# Altium PCB Fly-Balance.PcbDoc
Units mil, origin at the board's own origin, x right, y up, seen from the top; angles counter-clockwise.
Board outline 1574.8 x 1574.8 mil, 2 copper layers (Top Layer, Bottom Layer); 112 components, 74 nets, 389 pads, 282 vias.
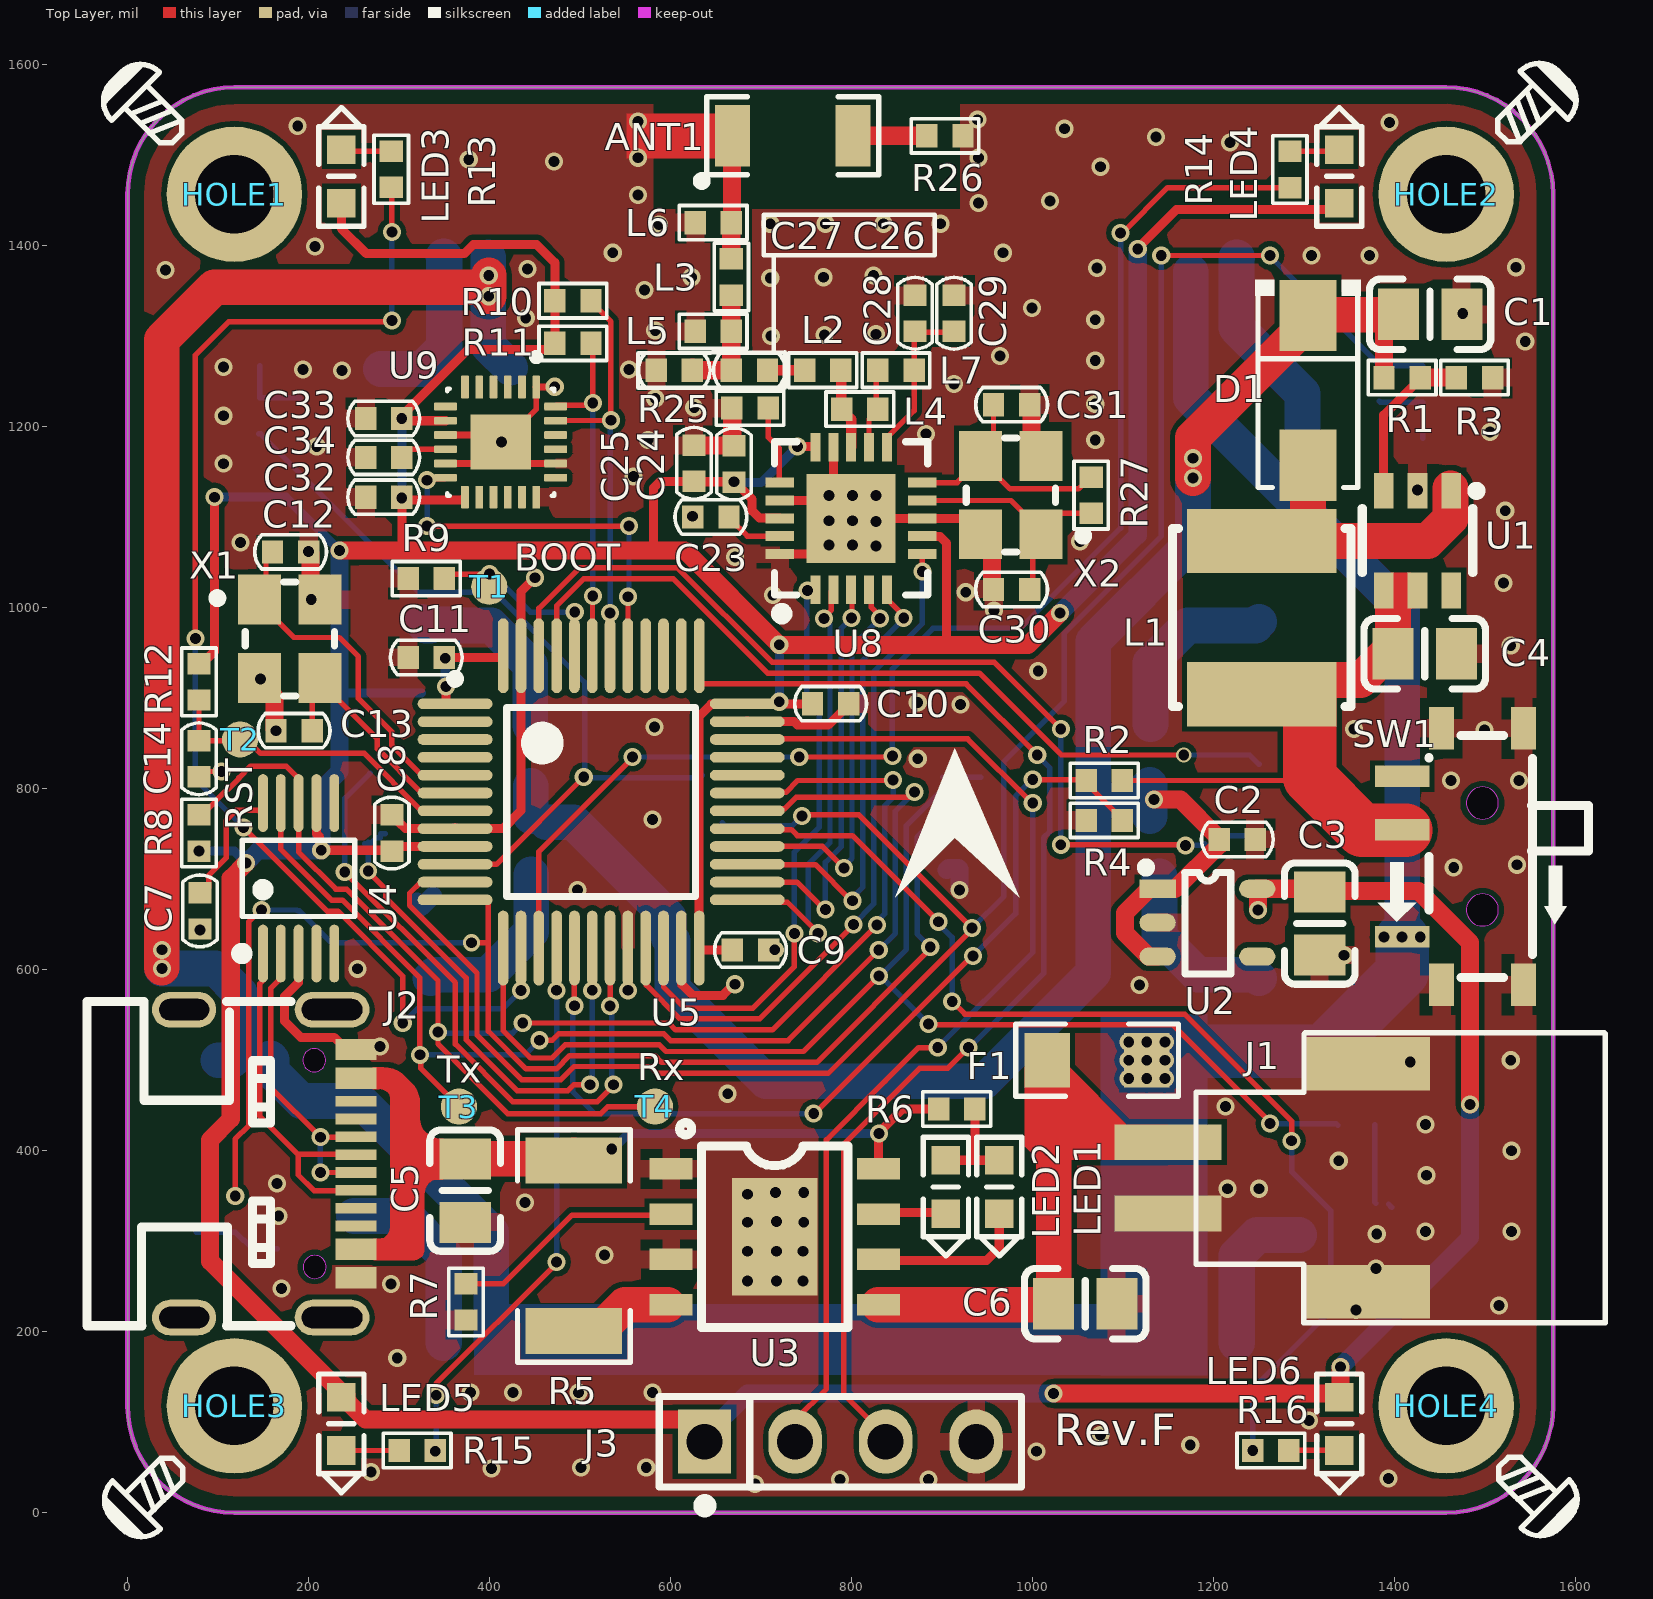
[diagram p0: Top Layer view]
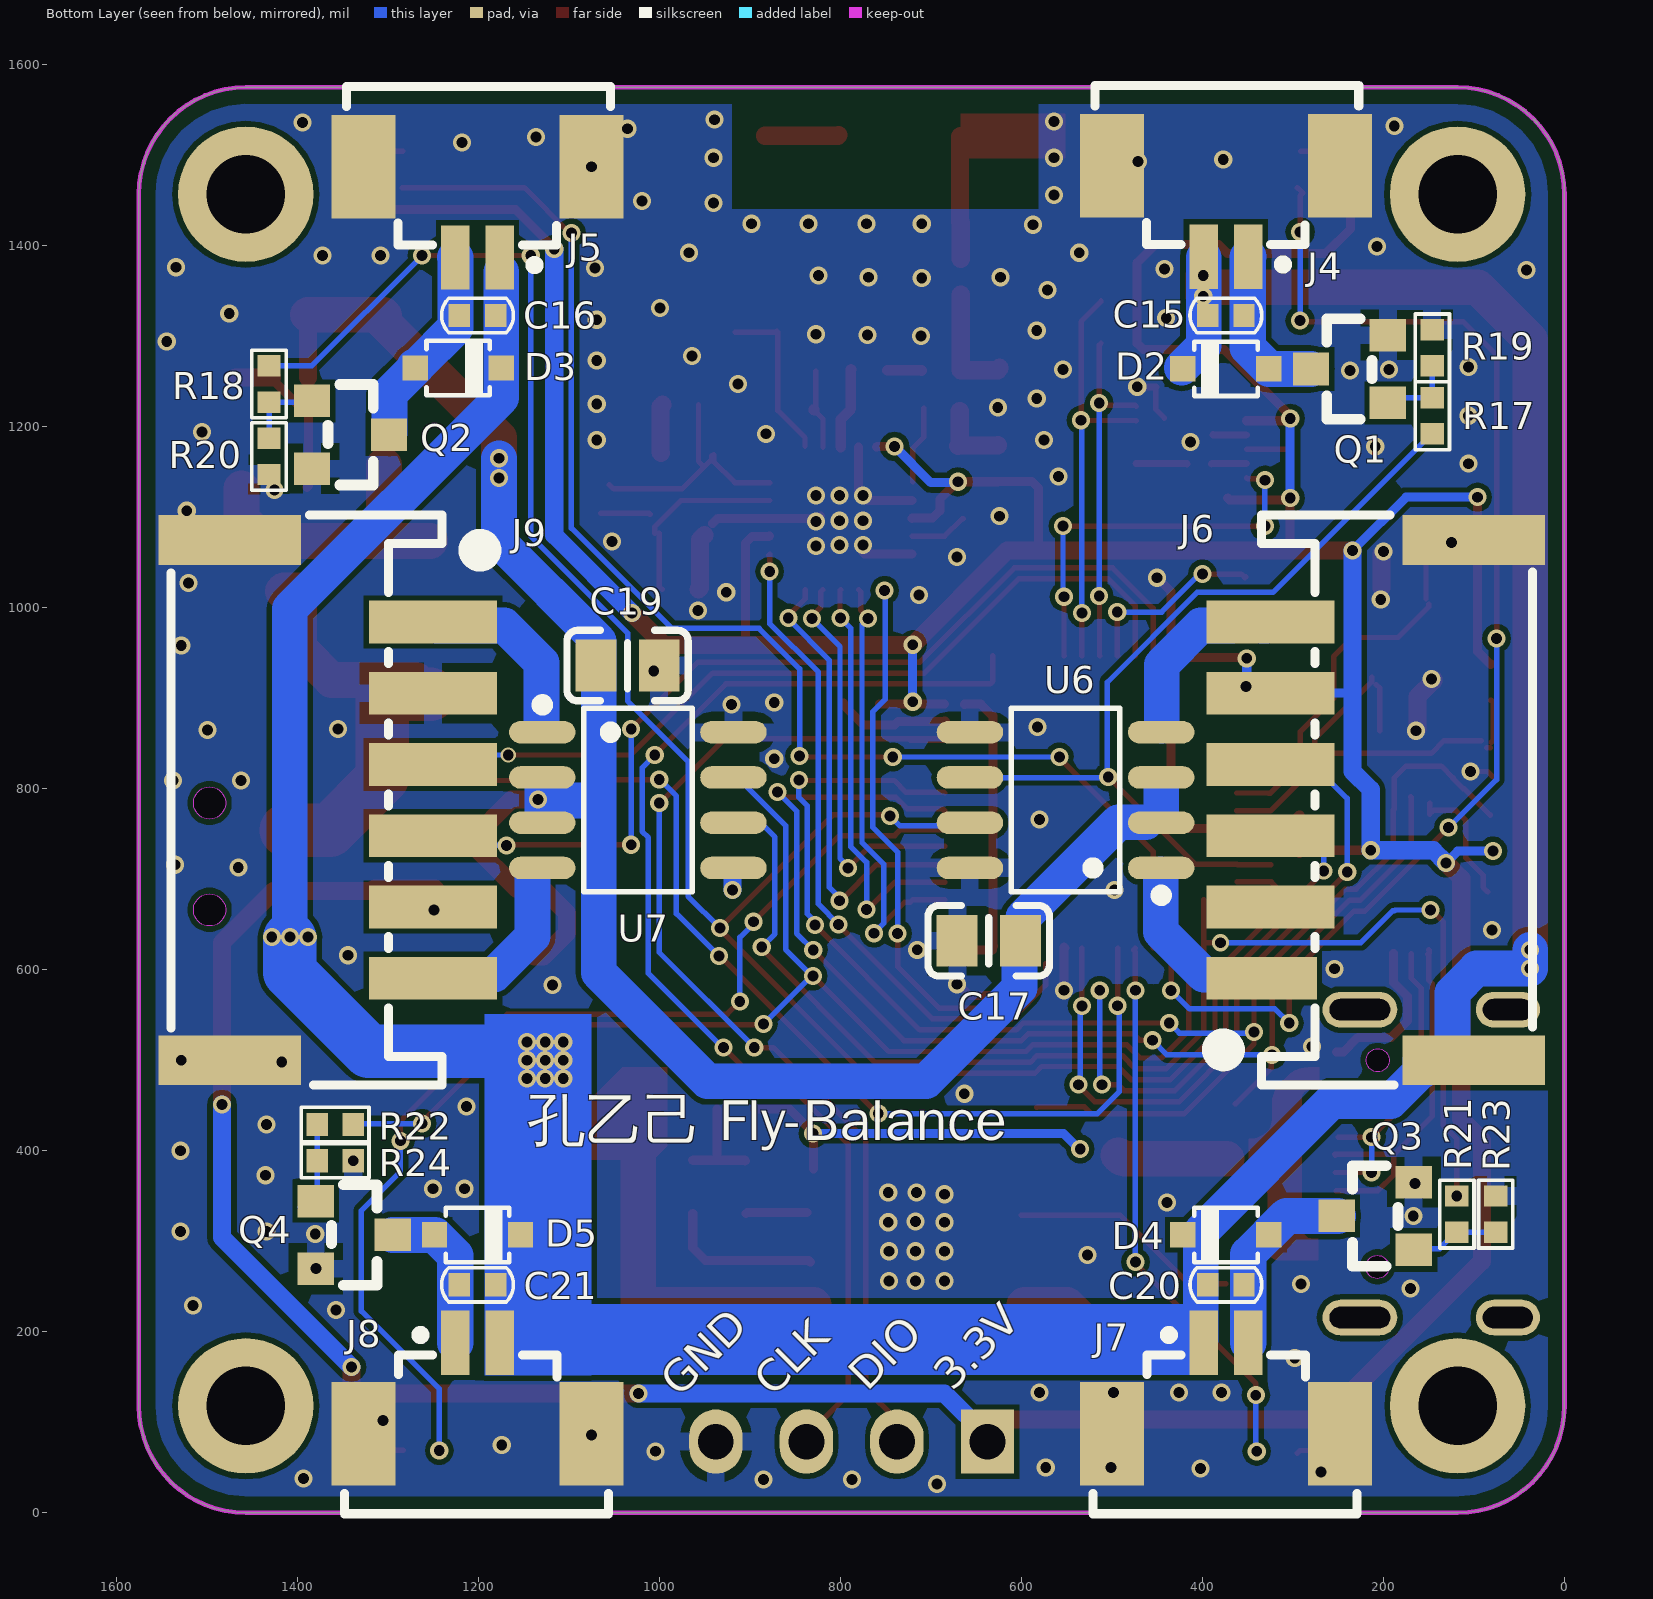
[diagram p1: Bottom Layer view, seen from below]

## Layer stack, top to bottom
Top Solder: solder mask 0.4, Solder Resist, Dk 3.5
Top Layer: signal copper 1.4
Dielectric 1: dielectric 12.6, FR-4, Dk 4.8
Bottom Layer: signal copper 1.4
Bottom Solder: solder mask 0.4, Solder Resist, Dk 3.5

## Board outline
0,118.11 ccw(c118.11,118.11) 118.11,0 1456.69,0 ccw(c1456.69,118.11) 1574.8,118.11 1574.8,1456.69 ccw(c1456.69,1456.69) 1456.69,1574.8 118.11,1574.8 ccw(c118.11,1456.69) 0,1456.69

## Design rules (kind name [scope] priority, off if disabled: settings)
Clearance Keep-Out [OnLayer('Keep-Out Layer')] p1: gap=15.75 ignorepadtopadclearanceinfootprint=FALSE except(0: Arc-Hole Track-Hole SMDPad-Hole THPad-Hole Via-Hole Fill-Hole Poly-Hole Region-Hole Text-Hole)
Clearance [All] p2: gap=6 ignorepadtopadclearanceinfootprint=FALSE except(0: Arc-Hole Track-Hole SMDPad-Hole THPad-Hole Via-Hole Fill-Hole Poly-Hole Region-Hole Text-Hole)
ComponentClearance [All] p1: gap=0 collisioncheckmode=3 verticalgap=0 showdistances=FALSE
HoleSize [All] p1: absolutevalues=TRUE maxlimit=200 minlimit=1 maxpercent=80.000 minpercent=20.000
HoleToHoleClearance [All] p1: gap=0 allowstackedmicrovias=TRUE
MinimumSolderMaskSliver [All] p1: minsoldermaskwidth=0
PolygonConnect PolygonConnect_2 [HasPad('J4-0') or HasPad('J5-0') or HasPad('J7-0')   or HasPad('J8-0') or HasPad('J6-8') or HasPad('J9-7') or HasPad('J9-8') or HasPad('J2-A1B12') or HasPad('J2-B1A12') or HasPad('J1-1') or HasPad('J1-0') or HasPad('R26-2') or HasPad('U3-9') or IsVia] p1: connectstyle=Direct reliefconductorwidth=10 reliefentries=4 polygonreliefangle="90 Angle" airgapwidth=10
PolygonConnect PolygonConnect_1 [All] p2: connectstyle=Relief reliefconductorwidth=20 reliefentries=4 polygonreliefangle="90 Angle" airgapwidth=10
RoutingVias [All] p1: holewidth=12 width=20 viastyle="Through Hole" minholewidth=12 minwidth=16 maxholewidth=28 maxwidth=50
SilkToSilkClearance [All] p1: silktosilkclearance=0
SilkToSolderMaskClearance [IsPad] p1: minsilkscreentomaskgap=0 clearancetoexposedcopper=TRUE
SolderMaskExpansion [All] p1: expansion=4
Width [All] p1: maxlimit=100 minlimit=6 preferedwidth=6
24 further rules are at their usual default settings.

## Classes and differential pairs
component class U_05_MPU6500: C32 C33 C34 U9
component class U_06_NRF24L01: ANT1 C23 C24 C25 C26 C27 C28 C29 C30 C31 L2 L3 L4 L5 L6 L7 R25 R26 R27 U8 X2
component class U_04_Motor_Driver: C15 C16 C17 C19 C20 C21 D2 D3 D4 D5 J4 J5 J6 J7 J8 J9 Q1 Q2 Q3 Q4 R17 R18 R19 R20 R21 R22 R23 R24 U6 U7
component class U_03_MCU: C8 C9 C10 C11 C12 C13 C14 J3 LED3 LED4 LED5 LED6 R9 R10 R11 R12 R13 R14 R15 R16 T1 T2 T3 T4 U5 X1
component class U_02_Power: C1 C2 C3 C4 C5 C6 C7 D1 F1 J1 J2 L1 LED1 LED2 R1 R2 R3 R4 R5 R6 R7 R8 SW1 U1 U2 U3 U4
component class 01_Fly-Balance: HOLE1 HOLE2 HOLE3 HOLE4

## Components (designator, comment, footprint, x,y, rotation, side; value= is the part's Value field where it differs from the comment)
ANT1 "CrossAir Antenna" ANT-SMD_L3.1-W1.6 734.98,1521.21 r0 top
C1 "22uF" 0805C 1439,1324 r0 top
C2 "104" 0402C 1226,744 r0 top
C3 "22uF" 0805C 1317,651 r270 top
C4 "22uF" 0805C 1433,949 r0 top
C5 "10uF" 0805C 373,356 r270 top
C6 "10uF" 0805C 1058,231 r0 top
C7 "104" 0402C 80,665 r270 top
C8 "104" 0402C 292,751 r270 top
C9 "104" 0402C 688.23,621.69 r180 top
C10 "104" 0402C 776.69,893.9 r180 top
C11 "104" 0402C 330,945 r0 top
C12 "20pF" 0402C 180.2,1061.61 r180 top
C13 "20pF" 0402C 184,864 r0 top
C14 "104" 0402C 79,833 r90 top
C15 "104" 0402C 374.02,1322.83 r180 bottom
C16 "104" 0402C 1200.79,1322.83 r0 bottom
C17 "22uF" 0805C 636,632 r0 bottom
C19 "22uF" 0805C 1035,936 r180 bottom
C20 "104" 0402C 374.02,251.97 r180 bottom
C21 "104" 0402C 1200.79,251.97 r0 bottom
C23 "33nF" 0402C 644.45,1100.08 r0 top
C24 "10nF" 0402C 670.08,1158.66 r90 top
C25 "1nF" 0402C 625.71,1159.41 r90 top
C26 "1.5pF" 0402C 686.98,1262.21 r180 top
C27 "1.0pF" 0402C 603.98,1262.21 r0 top
C28 "2.2nF" 0402C 869.98,1325.21 r90 top
C29 "4.7pF" 0402C 912.98,1325.21 r90 top
C30 "20pF" 0402C 976.61,1020.12 r0 top
C31 "20pF" 0402C 976.61,1224.13 r180 top
C32 "104" 0402C 283,1122 r180 top
C33 "10nF" 0402C 283,1209 r0 top
C34 "104" 0402C 283,1166 r180 top
D1 "SS24" SMA_L4.3-W2.5-LS5.0-RD 1304,1240 r90 top
D2 "1N4001" SOD-323 374.02,1263.78 r0 bottom
D3 "1N4001" SOD-323 1222.13,1264.69 r180 bottom
D4 "1N4001" SOD-323 374.02,307.09 r0 bottom
D5 "1N4001" SOD-323 1200.79,307.09 r180 bottom
F1 "5A" 1206R 1071,500 r180 top
HOLE1 "螺丝孔" HOLE-2.2 118.11,1456.69 r90 top
HOLE2 "螺丝孔" HOLE-2.2 1456.69,1456.69 r0 top
HOLE3 "螺丝孔" HOLE-2.2 118.11,118.11 r180 top
HOLE4 "螺丝孔" HOLE-2.2 1456.69,118.11 r270 top
J1 "Battery" 51005母座 1259.84,370.08 r90 top
J2 "Type-C" USB-C-SMD_TYPE-C-16P-1 157.48,385.83 r270 top
J3 "CON4" SIP-4-2.54 787.4,78.74 r0 top
J4 "FLY_MOT" CONN-SMD_2P-P1.25 374,1437.8 r0 bottom
J5 "FLY_MOT" CONN-SMD_2P-P1.25 1200.79,1437.01 r0 bottom
J6 "BAL_MOT" CONN-SMD_6P-P2.00_DEALON_PH-6PWB#1 212.6,787.4 r90 bottom
J7 "FLY_MOT" CONN-SMD_2P-P1.25 374.02,137.8 r180 bottom
J8 "FLY_MOT" CONN-SMD_2P-P1.25 1200.79,137.8 r180 bottom
J9 "BAL_MOT" CONN-SMD_6P-P2.00_DEALON_PH-6PWB#2 1362.2,787.4 r270 bottom
L1 "4.7uH" IND-SMD_L5.0-W5.0_FNR50XXS 1253,989 r90 top
L2 "3.9nH" 0402R 767.98,1262.21 r180 top
L3 "3nH" 0402R 666.98,1365.21 r90 top
L4 "8.2nH" 0402R 808.98,1219.21 r180 top
L5 "NC" 0402R 646.98,1305.21 r0 top
L6 "NC" 0402R 646.98,1425.21 r0 top
L7 "2.7nH" 0402R 848.98,1262.21 r0 top
LED1 "Green" LED-0603 963,360 r270 top value=0603Red,SMD
LED2 "Red" LED-0603 904,360 r270 top value=0603Red,SMD
LED3 "Blue" LED-0603 236.22,1476.38 r90 top value=0603Red,SMD
LED4 "Blue" LED-0603 1338.58,1476.38 r90 top value=0603Red,SMD
LED5 "Blue" LED-0603 236.22,98.43 r270 top value=0603Red,SMD
LED6 "Blue" LED-0603 1338.58,98.43 r270 top value=0603Red,SMD
Q1 "SI2302" SOT-23 237.64,1263.62 r0 bottom
Q2 "SI2302" SOT-23 1341,1191 r180 bottom
Q3 "SI2302" SOT-23 209,328 r0 bottom
Q4 "SI2302" SOT-23 1336.97,307.01 r180 bottom
R1 "18k" 0402R 1408,1254 r180 top
R2 "3.6k" 0402R 1079,809 r0 top
R3 "2k" 0402R 1488,1254 r180 top
R4 "10k" 0402R 1079,765 r0 top
R5 "200mΩ/750mW" 2010R 493,295 r90 top
R6 "1k" 0402R 916,446 r180 top
R7 "1k" 0402R 374,233 r90 top
R8 "10k" 0402R 79,751 r270 top
R9 "10k" 0402R 330,1032 r180 top
R10 "4.7k" 0402R 492,1339 r180 top
R11 "4.7k" 0402R 492,1292 r180 top
R12 "10k" 0402R 79,918 r90 top
R13 "200" 0402R 291.34,1484.25 r90 top
R14 "200" 0402R 1284,1484 r90 top
R15 "200" 0402R 320,69 r180 top
R16 "200" 0402R 1263,69 r0 top
R17 "22" 0402R 146,1212 r270 bottom
R18 "22" 0402R 1431,1247 r90 bottom
R19 "10k" 0402R 146,1287 r90 bottom
R20 "10k" 0402R 1431,1167 r270 bottom
R21 "22" 0402R 119,330 r90 bottom
R22 "22" 0402R 1358,429 r180 bottom
R23 "10k" 0402R 76,330 r90 bottom
R24 "10k" 0402R 1358,389 r180 bottom
R25 "22k" 0402R 687.64,1220.35 r0 top
R26 "0" 0402R 902.98,1521.21 r0 top
R27 "1M" 0402R 1064.61,1124.21 r90 top
SW1 "MSK12C02" MSK12C02 1475.12,725.12 r90 top
T1 "BOOT" PAD-40#1 409.45,1023.62 r0 top
T2 "RST" PAD-40#2 125.98,854.33 r0 top
T3 "Tx" PAD-40#3 366.14,448.82 r0 top
T4 "Rx" PAD-40#3 582.68,448.82 r0 top
U1 "ME2159BM6G" SOT-23-6_L2.9-W1.6-P0.95-LS2.8-BR 1425,1074 r270 top
U2 "XC6204B332MR" SOT-23-5 1193,652 r270 top
U3 "TP4056" ESOP-8_L4.9-W3.9-P1.27-LS6.0-BL-EP 715,305 r0 top
U4 "CH340E" MSOP-10_L3.0-W3.0-P0.50-LS5.0-BL 189,701 r0 top
U5 "CH32F203C8T6" LQFP-48_7x7 523.23,785.39 r0 top
U6 "L9110S" SOP-8_L4.9-W3.9-P1.27-LS6.0-BL 551.18,787.4 r0 bottom
U7 "L9110S" SOP-8_L4.9-W3.9-P1.27-LS6.0-BL 1023.62,787.4 r180 bottom
U8 "NRF24L01" QFN-20_L4.0-W4.0-P0.50-BL-EP 799.43,1098.6 r90 top
U9 "MPU6500" QFN-24_L3.0-W3.0-P0.40-BL-EP 412.13,1182.83 r270 top
X1 "8MHz" OSCCC250X320X80-4N 179.29,965.51 r90 top
X2 "16MHz" OSCCC250X320X80-4N 975.75,1124.33 r270 top

## Footprints (in the part's own frame and the unit in brackets; to place one, negate y for a bottom-side part, rotate by r counter-clockwise, add the part's x,y. Pads: shape width x height; smd on the part's side, far side on the other; paste and mask are expansions set on the pad)
0402C [mm]
  rect 0.6x0.65 smd mask+0.025: 1(-0.508,0) 2(0.508,0)
  silkscreen extent -1.01,-0.48 1.01,0.48, body extent -0.51,-0.23 0.49,0.27, height 0.5
0402R [mm]
  rect 0.6x0.65 smd mask+0.025: 1(-0.508,0) 2(0.508,0)
  silkscreen extent -0.95,-0.48 0.95,0.48, body extent -0.47,-0.25 0.53,0.25, height 0.35
0805C [mm]
  rect 1.15x1.45 smd: 1(-0.889,0) 2(0.889,0)
  silkscreen extent -1.7,-0.99 1.7,0.99, body extent -1,-0.63 1,0.63, height 0.78
1206R [mil] "元件 长X宽=120X60mil"
  rect 50x60 smd: 1(-55,0) 2(55,0)
  silkscreen extent -90,-40 90,40, body extent -63,-31 63,31, height 24
2010R [mm]
  rect 1.283x2.7 smd mask+0.051: 1(-2.391,0) 2(2.391,0)
  silkscreen extent -3.26,-1.58 3.26,1.58
51005母座 [mm]
  rect 1.5x3.5 smd: 0(-3.2,-2.8) 0(3.2,-2.8)
  rect 1x3 smd: 1(-1,2.8) 2(1,2.8)
  silkscreen extent -4.07,-9.46 4.07,2.02
ANT-SMD_L3.1-W1.6 [mil]
  rect 38.7x68 smd mask+2: 1(-66.6,0) 2(66.6,0)
  silkscreen extent -106,-55 95,43
CONN-SMD_2P-P1.25 [mil]
  rect 70.9x114.2 smd mask+1.97: 0(-126,-50.2) 0(126,-50.2)
  rect 31.5x70.9 smd mask+1.97: 1(-24.6,50.2) 2(24.6,50.2)
  silkscreen extent -147,-139 145,64
CONN-SMD_6P-P2.00_DEALON_PH-6PWB#1 [mm]
  rect 1.2x3.1 smd mask+0.05: 1(-5,3.1)
  rect 1.2x3.6 smd mask+0.05: 2(-3,2.85) 3(-1,2.85) 4(1,2.85) 5(3,2.85) 6(5,2.85)
  rect 1.4x4 smd mask+0.05: 7(-7.3,-2.85) 8(7.3,-2.85)
  silkscreen extent -8,-4.5 8,4.45
CONN-SMD_6P-P2.00_DEALON_PH-6PWB#2 [mm]
  rect 1.2x3.6 smd mask+0.05: 1(-5,2.85) 2(-3,2.85) 3(-1,2.85) 4(1,2.85) 5(3,2.85) 6(5,2.85)
  rect 1.4x4 smd mask+0.05: 7(-7.3,-2.85) 8(7.3,-2.85)
  silkscreen extent -8,-4.5 8,4.45
ESOP-8_L4.9-W3.9-P1.27-LS6.0-BL-EP [mm]
  rect 1.2x0.6 smd mask+0.051: 1(-2.908,1.905) 2(-2.908,0.635) 3(-2.908,-0.635) 4(-2.908,-1.905) 5(2.908,-1.905) 6(2.908,-0.635) 7(2.908,0.635) 8(2.908,1.905)
  rect 2.4x3.3 smd mask+0.051: 9(0,0)
  silkscreen extent -2.67,-2.55 2.05,3.2
HOLE-2.2 [mm]
  round 3.8 hole 2.2: 1(0,0)
  silkscreen extent 1.45,1.47 3.64,3.67
IND-SMD_L5.0-W5.0_FNR50XXS [mm]
  rect 1.8x4.2 smd mask+0.051: 1(-2.15,0) 2(2.15,0)
  silkscreen extent -2.5,-2.5 2.5,2.5
LED-0603 [mm] "20100324  贴片0603LED   LSB"
  rect 0.8x0.8 smd: 1(-0.75,0) 2(0.75,0)
  silkscreen extent -1.4,-0.64 1.93,0.64, body extent -0.8,-0.4 0.8,0.4, height 0.4
LQFP-48_7x7 [mm]
  oval 2.1x0.3 smd: 1(-4.1,2.75) 2(-4.1,2.25) 3(-4.1,1.75) 4(-4.1,1.25) 5(-4.1,0.75) 6(-4.1,0.25) 7(-4.1,-0.25) 8(-4.1,-0.75) 9(-4.1,-1.25) 10(-4.1,-1.75) 11(-4.1,-2.25) 12(-4.1,-2.75) 25(4.1,-2.75) 26(4.1,-2.25) 27(4.1,-1.75) 28(4.1,-1.25) 29(4.1,-0.75) 30(4.1,-0.25) 31(4.1,0.25) 32(4.1,0.75) 33(4.1,1.25) 34(4.1,1.75) 35(4.1,2.25) 36(4.1,2.75)
  oval 0.3x2.1 smd: 13(-2.75,-4.1) 14(-2.25,-4.1) 15(-1.75,-4.1) 16(-1.25,-4.1) 17(-0.75,-4.1) 18(-0.25,-4.1) 19(0.25,-4.1) 20(0.75,-4.1) 21(1.25,-4.1) 22(1.75,-4.1) 23(2.25,-4.1) 24(2.75,-4.1) 37(2.75,4.1) 38(2.25,4.1) 39(1.75,4.1) 40(1.25,4.1) 41(0.75,4.1) 42(0.25,4.1) 43(-0.25,4.1) 44(-0.75,4.1) 45(-1.25,4.1) 46(-1.75,4.1) 47(-2.25,4.1) 48(-2.75,4.1)
  silkscreen extent -4.22,-2.65 2.65,3.57, body extent -3.5,-3.5 3.5,3.5, height 1.6
MSK12C02 [mm]
  rect 1.2x0.7 smd mask+0.051: 0(-3.6,-1.7) 0(-3.6,0.6) 0(3.6,-1.7) 0(3.6,0.6)
  rect 0.6x1.524 smd mask+0.051: 1(-2.25,1.7) 2(0.75,1.7) 3(2.25,1.7)
  Keep-Out Layer board cut-out: 1.95,-0.55 1.906,-0.355 1.781,-0.198 1.6,-0.111 1.4,-0.111 1.22,-0.198 1.095,-0.355 1.05,-0.55 1.05,-0.55 1.095,-0.745 1.22,-0.902 1.4,-0.989 1.6,-0.989 1.781,-0.902 1.906,-0.745 1.95,-0.55
  Keep-Out Layer board cut-out: -1.05,-0.55 -1.094,-0.355 -1.219,-0.198 -1.4,-0.111 -1.6,-0.111 -1.78,-0.198 -1.905,-0.355 -1.95,-0.55 -1.95,-0.55 -1.905,-0.745 -1.78,-0.902 -1.6,-0.989 -1.4,-0.989 -1.219,-0.902 -1.094,-0.745 -1.05,-0.55
  silkscreen extent -3.4,-3.53 3.4,0.95
MSOP-10_L3.0-W3.0-P0.50-LS5.0-BL [mil]
  oval 11x63.8 smd mask+2: 1(-39.4,-83.1) 2(-19.7,-83.1) 3(0,-83.1) 4(19.7,-83.1) 5(39.4,-83.1) 6(39.4,83.1) 7(19.7,83.1) 8(0,83.1) 9(-19.7,83.1) 10(-39.4,83.1)
  silkscreen extent -69,-89 62,42
OSCCC250X320X80-4N [mm]
  rect 1.4x1.2 smd: 1(1.1,0.85) 2(-1.1,0.85) 3(-1.1,-0.85) 4(1.1,-0.85)
  silkscreen extent -1.6,-1.25 1.6,2.16
PAD-40#1 [mil]
  round 40 smd paste-43.31: 1(-9.8,-0.51)
PAD-40#2 [mil]
  round 40 smd paste-43.31: 1(-1.57,0)
PAD-40#3 [mil]
  round 40 smd paste-43.31: 1(0,0)
QFN-20_L4.0-W4.0-P0.50-BL-EP [mil]
  rect 31.5x11 smd mask+2: 1(-78.7,39.4) 2(-78.7,19.7) 3(-78.7,0) 4(-78.7,-19.7) 5(-78.7,-39.4) 11(78.7,-39.4) 12(78.7,-19.7) 13(78.7,0) 14(78.7,19.7) 15(78.7,39.4)
  rect 11x31.5 smd mask+2: 6(-39.4,-78.7) 7(-19.7,-78.7) 8(0,-78.7) 9(19.7,-78.7) 10(39.4,-78.7) 16(39.4,78.7) 17(19.7,78.7) 18(0,78.7) 19(-19.7,78.7) 20(-39.4,78.7)
  rect 98.4x98.4 smd mask+2: 21(0,0)
  silkscreen extent -111,-85 85,85
QFN-24_L3.0-W3.0-P0.40-BL-EP [mm]
  rrect25% 0.64x0.22 smd: 1(-1.545,1) 2(-1.545,0.6) 3(-1.545,0.2) 4(-1.545,-0.2) 5(-1.545,-0.6) 6(-1.545,-1) 13(1.545,-1) 14(1.545,-0.6) 15(1.545,-0.2) 16(1.545,0.2) 17(1.545,0.6) 18(1.545,1)
  rrect25% 0.22x0.64 smd: 7(-1,-1.545) 8(-0.6,-1.545) 9(-0.2,-1.545) 10(0.2,-1.545) 11(0.6,-1.545) 12(1,-1.545) 19(1,1.545) 20(0.6,1.545) 21(0.2,1.545) 22(-0.2,1.545) 23(-0.6,1.545) 24(-1,1.545)
  rect 1.54x1.7 smd paste-2: 25(0,0)
  silkscreen extent -2.48,-1.5 1.5,1.5
SIP-4-2.54 [mm]
  rect 1.5x1.8 hole 1: 1(-3.81,0)
  oval 1.5x1.8 hole 1: 2(-1.27,0) 3(1.27,0) 4(3.81,0)
  silkscreen extent -5.08,-1.92 5.08,1.27, body extent -5.08,-1.27 5.08,1.27, height 7.58
SMA_L4.3-W2.5-LS5.0-RD [mm]
  rect 2x1.593 smd mask+0.051: 1(-2.1,0) 2(2.1,0)
  silkscreen extent -2.73,-1.48 3.11,1.48
SOD-323 [mil]
  rect 28x28 smd: 1(-47.5,0) 2(47.5,0)
  silkscreen extent -35,-30 35,30, body extent -51,-26 51,25, height 39
SOP-8_L4.9-W3.9-P1.27-LS6.0-BL [mm]
  oval 1.865x0.63 smd mask+0.051: 1(-2.682,1.905) 2(-2.682,0.635) 3(-2.682,-0.635) 4(-2.682,-1.905) 5(2.682,-1.905) 6(2.682,-0.635) 7(2.682,0.635) 8(2.682,1.905)
  silkscreen extent -2.83,-2.58 1.52,2.82
SOT-23 [mil]
  rect 40x36 smd: 1(-42.5,37.4) 2(-42.5,-37.4) 3(42.5,0)
  silkscreen extent -25,-56 25,56, body extent -47,-57 50,58, height 39
SOT-23-5 [mil]
  rect 20x40 smd: 1(-37.4,-55)
  oval 20x40 smd: 2(0,-55) 3(37.4,-55) 4(37.4,55) 5(-37.4,55)
  silkscreen extent -66,-73 57,26, body extent -57,-55 57,55, height 43
SOT-23-6_L2.9-W1.6-P0.95-LS2.8-BR [mm]
  rect 1x0.55 smd mask+0.051: 1(-1.4,0.95) 2(-1.4,0) 3(-1.4,-0.95) 4(1.4,-0.95) 5(1.4,0) 6(1.4,0.95)
  silkscreen extent -1.52,-1.55 0.9,1.78
USB-C-SMD_TYPE-C-16P-1 [mm]
  rect 0.6x1.15 smd mask+0.05: A1B12(-3.2,2.41) A4B9(-2.4,2.41) B1A12(3.2,2.41) B4A9(2.4,2.41)
  rect 0.3x1.15 smd mask+0.05: A5(-1.25,2.41) A6(-0.25,2.41) A7(0.25,2.41) A8(1.25,2.41) B5(1.75,2.41) B6(0.75,2.41) B7(-0.75,2.41) B8(-1.75,2.41)
  oval 1x2.1 hole 0.6 slot 1.7 at 90 deg mask+0.05: EP(-4.32,1.74) EP(4.32,1.74)
  oval 1x1.8 hole 0.6 slot 1.4 at 90 deg mask+0.05: EP(-4.32,-2.41) EP(4.32,-2.41)
  Keep-Out Layer board cut-out: -2.575,1.24 -2.607,1.381 -2.697,1.494 -2.828,1.557 -2.972,1.557 -3.103,1.494 -3.193,1.381 -3.225,1.24 -3.225,1.24 -3.193,1.099 -3.103,0.986 -2.972,0.923 -2.828,0.923 -2.697,0.986 -2.607,1.099 -2.575,1.24
  Keep-Out Layer board cut-out: 3.225,1.25 3.193,1.391 3.103,1.504 2.972,1.567 2.828,1.567 2.697,1.504 2.607,1.391 2.575,1.25 2.575,1.25 2.607,1.109 2.697,0.996 2.828,0.933 2.972,0.933 3.103,0.996 3.193,1.109 3.225,1.25
  silkscreen extent -4.55,-5.14 4.55,0.59

## Part data
ANT1: library part CON2, "Connector"
C1 C2 C3 C4 C5 C6 C7 C8 C9 C10 C11 C12 C13 C14 C15 C16 C17 C19 C20 C21 C23 C24 C25 C26 C27 C28 C29 C30 C31 C32 C33 C34: "电容"
D1 D2 D3 D4 D5: "二极管"
F1: "保险丝"
HOLE1 HOLE2 HOLE3 HOLE4: library part "HOLE - 螺丝孔"
J1 J4 J5 J7 J8: library part CON, "直流电机接口"
J3: "Connector"
J6 J9: library part CON8, "Connector"
L1 L2 L3 L4 L5 L6 L7: "电感"
LED1 LED2 LED3 LED4 LED5 LED6: "发光二极管"
Q1 Q2 Q3 Q4: "N-MOSFET"
R1 R2 R3 R4 R5 R6 R7 R8 R9 R10 R11 R12 R13 R14 R15 R16 R17 R18 R19 R20 R21 R22 R23 R24 R25 R26 R27: "电阻"
SW1: library part 单刀双掷开关
T1 T2 T3 T4: library part TEST-DOT, "测试点"
U1: "DC-DC升压芯片"
U2: "LDO, 3.0V输出"
U3: library part 4056, "单节锂电池充电芯片"
U4: "USB-TTLоƬ"
U5: library part STM32F103C, "STM32单片机48引脚"
U6 U7: "H桥电机驱动芯片"
U8: "2.4G无线通信芯片"
U9: "三轴加速度计和三轴陀螺仪"
X1 X2: "4pin贴片无源晶振"

## Via types
v1: diameter 20, hole 12, Top Layer to Bottom Layer, tented both sides, 279 vias
v2: diameter 19, hole 12, Top Layer to Bottom Layer, tented both sides, 2 vias
v3: diameter 17, hole 12, Top Layer to Bottom Layer, tented both sides, 1 vias

## Nets (pads, with @x,y where several pads share a name; then routed paths per layer and width w, separated by ;. In a path a pad name is that pad's centre, name@x,y a point inside that pad or via, vN(x,y) a via of type N, cw(c..) or ccw(c..) an arc to the next point about the centre after c; other vN are vias at no path point)
3.3V: C3.1 C8.2 C9.2 C10.2 C11.2 C24.1 C25.1 C32.1 C33.2 J3.1 J6.5 J9.5 LED3.1 LED4.1 LED5.1 LED6.1 R8.2 R10.2 R11.2 R12.2 U2.5 U4.7 U5.1 U5.9 U5.24 U5.36 U5.48 U8.7 U8.15 U8.18 U9.8 U9.13 | length 7230.8
  Top Layer w10: R12.2@81.87,937.46 81.42,937.91 82.4,937.91 96,951.51 v1(96,1122) ; U4.7@209,784 208.89,783.89 208.89,750.11 212.09,746.91 212.09,733.91 v1(214,732) 289,732 C8.2@292.64,728.36 ; LED3.1 236.22,1418.78 264,1391 372,1391 382,1401 452,1401 472,1381 R10.2 R11.2 465,1285 376,1285 C33.2@302,1211 ; C8.2@298,734 298,734.39 299.8,736.18 U5.9 ; 303,1063 C32.1@303,1120 ; v1(303,1121) C32.1@303,1120 ; C33.2@310.45,1206.45 U9.8 ; C11.2 v1(351,944) ; v1(352,913) 352,894.5 352.84,893.66 U5.1 ; C11.2@353,944 354,945 414.12,945 414.96,945.84 U5.48 ; U9.13@372,1121 370,1119 305.02,1119 304.02,1120 C32.1@303,1120 ; 579,1065 581,1067 581,1132 588.41,1139.41 C25.1 626.08,1139.04 v1(670,1139) v1(670,1139) 670.72,1139 690,1119.72 690,1107 697.9,1099.1 720.23,1099.1 U8.18 ; U5.24@631,626 631.5,626.5 631.5,880.17 644.64,893.32 662.68,893.32 U5.36@663,893 ; U5.24@632,622 632.31,621.69 C9.2 ; U5.36 717.66,893.66 U5.36@717.78,893.78 ; v1(720,896) U5.36@717.78,893.78 ; v1(740,1178) 759.53,1178 760.03,1177.5 U8.15 ; C10.2@756.77,893.78 U5.36@717.78,893.78 ; U8.7 878.63,1078.4 897.6,1078.4 904.88,1071.12 904.88,958.69 ; v1@1119,1399 1119,1400 1159,1440 1331.73,1440 LED4.1
  Top Layer w20: v1(131,718) 114.03,701.03 114.03,434.9 91,411.87 91,278 239,130 LED5.1@242,130 ; v1(234,1063) 303,1063 615.66,1063 719.97,958.69 904.88,958.69 994.69,958.69 v1(1030,994) ; LED5.1 241.97,122.21 243.79,122.21 263,103 617.87,103 J3.1@637.4,83.47 ; J3.1 J3.1@637.4,83.47 ; J3.1@637.4,84.65 J3.1@637.4,83.47 ; v1@720,958.73 v1(720,959) ; v1(1023,132) LED6.1@1334,132 ; U2.5 U2.5@1249,689.4 ; v1(1249,666) U2.5@1249,689.4 ; C3.1@1316,688 1314.6,689.4 U2.5@1249,689.4 ; C3.1@1317,687 1426,687 1483,630 v1(1483,451) ; LED6.1 1340,129.37 v1(1340,161)
  Bottom Layer w10: v1(79,731) 118,731 v1@130,719 ; v1(96,1122) 175.05,1122 v1@232,1065.05 ; 234,910 238.49,905.51 J6.5 ; v1(303,1121) v1(303,1209) ; J6.5@351,913 v1(351,944) ; v1(670,1139) 671,1138 700,1138 v1(740,1178) ; v1(720,896) v1@720,958
  Bottom Layer w20: v1(131,718) 145,732 v1(214,732) 214,799 234,819 234,910 v1(234,1063) ; J3.1 637.4,84.65 684.76,132 v1(1023,132) ; v1(1030,994) 1116,1080 v1(1116,1396) ; v1(1340,161) 1483,304 v1(1483,451)
6V: C1.1 C2.1 C17.1 C19.1 D1.2 R1.2 U2.1 U2.3 U6.2 U6.3 U7.2 U7.3 | length 2255.1
  Top Layer w20: v1(1134,788) 1162.98,788 1206,744.98 C2.1 1206,737.92 1157.08,689 U2.1@1144,689 ; U2.3 1128,614.6 1102,640.6 1102,662.77 1128.23,689 U2.1@1139,689 ; C1.1@1386,1327 1388,1325 1388,1323.34 R1.2
  Top Layer w39.37: v1(1177,1143) v1(1177,1165) 1177,1187.67 1304,1314.67 D1.2 1304.66,1323.34 C1.1@1388,1323.34
  Bottom Layer w39.37: U6.2@445.57,769.69 U6.3@445.57,803 ; U6.2@462.6,763 493,763 598.05,657.95 598.05,634.95 C17.1 ; C17.1@600,634 602,632 602,580 705.31,476.69 946.69,476.69 1066.83,596.83 1066.83,962.83 1177,1073 v1(1177,1143) v1@1177,1164.71 ; 1067,787 1112.23,787 1129.23,804 U7.3@1129.23,769.69
ADC_BATT: R2.1 R4.2 U5.17 | length 1022.2
  Top Layer w6: v1(493.7,560.17) U5.17 ; v1(758,441) 759,441 933,615 v1(934,615) ; v1(1000,810) 1058,810 R2.1 1059,806 1090.19,774.81 1090.19,773.81 R4.2@1096,768
  Bottom Layer w6: v1(493.7,560.17) 492,558.46 492,465.13 516.13,441 v1(758,441) ; v1(934,615) 981,662 981,791.87 999.13,810 v1(1000,810)
BAL_MOT_L_A: J6.3 U5.18 | length 564.7
  Top Layer w6: v2(266,709) 266,708 285,689 285,680 374.1,590.9 374.1,522.66 430.27,466.5 486.5,466.5 493,473 v1(511,473)
  Bottom Layer w6: J6.3@259,730 J6.3@266,737 ; J6.3@262,739 J6.3@263,738 ; v2(266,709) J6.3@266,737 ; J6.3@266,741 J6.3@266,737 ; J6.3@279,746 275,746 J6.3@266,737 ; J6.3@279.53,750 J6.3@285,750 ; v1(511,473) 513.39,475.39 v1(513.39,577.25)
BAL_MOT_L_B: J6.4 U5.19 | length 725.9
  Top Layer w6: v1@240,707 241,707 362.1,585.9 362.1,517.69 425.8,454 518.87,454 537,472.13 v1(537,473) ; U5.19 533.19,623.85 533.19,563.05 534.61,561.63 v1@533.08,560.11
  Bottom Layer w6: v1(240,708) 240,789.21 267.79,817 J6.4@268,817 ; v1(533.04,560.11) 535,558.15 535,473 v1(537,473)
BAL_MOT_L_M+: J6.1 U6.1 | length 195.8
  Bottom Layer w39.37: J6.1 338.58,594.49 398.49,594.49 446,642 U6.1@446,705.12
BAL_MOT_L_M-: J6.6 U6.4 | length 208.2
  Bottom Layer w39.37: J6.6 328.74,980.31 334.85,980.31 336.22,981.69 365.78,981.69 367.15,980.31 401.69,980.31 445,937 U6.4@445,869.69
BAL_MOT_LA: R17.2 U5.10 U6.6 | length 930.1
  Top Layer w6: U5.10@324.39,715.91 U5.10@361.22,715.91 ; U5.10 407.5,716.5 v1(504,813)
  Bottom Layer w6: R17.2@145,1192 R17.2 147,1192 322.13,1016.87 405.69,1016.87 505,917.57 505,815.44 504,814.44 v1(504,813) 504.8,812.2 632.2,812.2 U6.6@635,815
BAL_MOT_LB: R18.2 U5.11 U6.7 | length 2391.9
  Top Layer w6: U5.11@361.61,697.17 324.17,697.17 311.47,684.47 311.47,670.95 386.1,596.32 386.1,527.63 435.24,478.5 478.74,478.5 493.33,493.09 577.54,493.09 584.99,485.64 774.28,485.64 933,644.36 v1(933,646) ; v1@740.79,771 808,771 932,647 v1@933,647 ; v1(1142,1389) v1(1262,1389)
  Bottom Layer w6: U6.7 660.19,759 734,759 v1(745,770) ; v1(933,646) 968,681 968,829.87 1035,896.87 1035,971.87 1142,1078.87 v1(1142,1389) ; v1@1264,1388 1264,1387 1384,1267 R18.2
BAL_MOT_R_A: J9.3 U5.45 | length 928.8
  Top Layer w6: U5.45 474.02,986.11 474,1001.87 504.13,1032 602.82,1032 707.13,927.69 941.18,927.69 1031.68,837.19 v3(1166.8,837.19) v3@1167,837
  Bottom Layer w6: v3(1166.8,837.19) 1239.58,837.19 J9.3
BAL_MOT_R_B: J9.4 U5.46 | length 1080.7
  Top Layer w6: U5.46 454.33,999.17 499.16,1044 607.79,1044 712.1,939.69 957.31,939.69 1030,867 v1@1030,865 ; v1@1028,738 v1(1031,738) 1168.11,738 v1(1168.71,737.4)
  Bottom Layer w6: v1(1031,738) 1031,864 1032,865 v1(1031,866) ; v1(1168.71,737.4) 1188.4,737.4 1190,739 1194,735 1207.03,748.03 J9.4
BAL_MOT_R_M+: J9.1 U7.1 | length 206.7
  Bottom Layer w39.37: U7.1@1130,871 1130,939 1171.31,980.31 1246.06,980.31 J9.1
BAL_MOT_R_M-: J9.6 U7.4 | length 195.2
  Bottom Layer w39.37: U7.4@1140,703 1140,637 1182.51,594.49 1246.06,594.49 J9.6
BAL_MOT_RA: R21.2 U5.12 U7.6 | length 1488.4
  Top Layer w6: v1(119,350) 119,413 134,428 134,653 147,666 v1(148,666) ; v2(379.92,629.8) 380.16,629.57 398.5,629.57 ; U5.12@398.5,677.13 398.5,629.57 ; v1@887.64,624.98 887.64,623.77 761.51,497.64 589.96,497.64 582.51,505.09 488.36,505.09 473.77,490.5 440.21,490.5 398.5,532.2 398.5,629.57
  Bottom Layer w6: v1(148,666) 187,666 188,665 190,665 225,630 379,630 v2@380,629 ; v1(886.77,625) 872.3,639.47 872.3,746.63 888.07,762.4 U7.6
BAL_MOT_RB: R22.2 U5.13 U7.7 | length 1441.1
  Top Layer w6: U5.13@412.04,621.05 U5.13 ; U5.13@414.61,623.35 414.96,622.99 414.96,532.72 445.18,502.5 468.8,502.5 483.39,517.09 587.48,517.09 594.93,509.64 746.64,509.64 v1(830,593) ; v1(885,540) 886,539 1154.73,539 1262,431.73 v1(1262,430)
  Bottom Layer w6: v1(830,593) v1@831,593 ; v1(885,540) 832,593 v1@831,593 ; U7.7@900.72,812.4 U7.7 U7.7@942.32,812.4 ; U7.7@917.76,810.24 911.27,810.24 860.3,759.27 860.3,622.3 v1@831,593 ; v1(1262,430) 1335,430 R22.2@1337,428
BOOT: R9.1 T1.1 U5.44 | length 209.8
  Top Layer w6: R9.1@352,1034 353,1033 357,1037 v1(400,1037) ; U5.44 493.85,946.96 493.85,994.85 v1(494,995)
  Bottom Layer w6: v1(400,1037) 403,1037 445,995 v1(494,995)
GND: ANT1.1 C1.2 C2.2 C3.2 C4.2 C5.2 C6.2 C7.2 C8.1 C9.1 C10.1 C11.1 C12.1 C13.1 C14.1 C17.2 C19.2 C23.1 C24.2 C25.2 C27.1 C28.2 C29.2 C30.1 C31.1 C32.2 C33.1 C34.2 J1.0 J1.1 J2.A1B12 J2.B1A12 J3.4 J4.0 J5.0 J6.2 J6.8 J7.0 J8.0 J9.2 J9.7 J9.8 L3.2 L5.1 L6.1 L6.2 Q1.2 Q2.2 Q3.2 Q4.2 R3.1 R4.1 R7.1 R9.2 R19.2 R20.2 R23.2 R24.2 R25.1 R26.2 SW1.0 U1.2 U2.2 U3.1 U3.3 U3.9 U4.3 U5.8 U5.20 U5.23 U5.35 U5.47 U6.5 U6.8 U7.5 U7.8 U8.8 U8.14 U8.17 U8.20 U8.21 U9.1 U9.9 U9.11 U9.18 U9.20 U9.25 X1.2 X1.4 X2.2 X2.4 | length 1887
  Top Layer w6: C14.1 85,819 v1(104,819) ; U9.25@442,1209 442,1209.55 451.35,1218.91 451.35,1243.51 U9.1
  Top Layer w8: U9.11 389.8,1159.2 U9.25@390,1159 ; U9.9 387.7,1190.7 U9.25@388,1191 ; U9.25@417,1159 417.2,1159.2 U9.20 ; U9.1 451.67,1243.83 471.83,1243.83 v1(472,1244)
  Top Layer w10: v1(80,644) C7.2@82.42,644 ; U4.3 188.81,617.71 188.81,585.81 173.65,570.65 173.65,543.2 191.62,525.22 228.13,525.22 244.36,509 J2.A1B12@252,509 ; C8.1 292.98,771 299.8,764.19 299.8,763.2 307.13,755.87 U5.8 ; U5.8@362,757 363,756 415,756 434.65,775.65 U5.47 434.65,1017.65 v1(450,1033) ; U5.20@552,624 U5.20@553.1,625.1 ; v1(552.76,577.25) v1(552.76,577.25) 552.75,577.34 U5.20@552.75,623.97 ; U5.23@611.46,624.32 U5.23 612.16,623.63 612.16,583.97 624.49,571.64 657.64,571.64 670,584 v1(671,584) v1@676,584 ; U5.23@611.81,621.22 U5.23@612,621.03 ; U5.35 736.45,873.98 740.33,870.1 773.88,870.1 796.65,892.87 C10.1@796.65,894.41 ; C9.1@709.52,622 C9.1@710,622 ; U8.20 773.2,1059.2 U8.21@775,1061 ; U8.17 770.3,1118.3 U8.21@771,1119 ; U8.21@779,1128 779.73,1128.73 U8.14 ; U8.21@822,1101 824.4,1098.6 U8.8 935.4,1098.6 X2.4@941,1093
  Top Layer w12: U5.35@684.55,873.88 U5.35
  Top Layer w20: X1.2@145,921 145,919.09 162.19,901.91 162.19,865.81 v1(164,864) ; C12.1 202.01,1059.8 X1.4@202.01,1022.01 ; C25.2 626.08,1179.04 668.96,1179.04 C24.2@669,1179 ; L3.2 L6.2@666.98,1424.98 ; L6.2 667.68,1425.91 667.68,1520.32 ANT1.1@667,1521 ; R25.1@668,1217 668,1180.47 669.81,1178.66 C24.2 ; X2.4@950,1080 954.8,1075.2 954.8,1021.93 C30.1 ; C31.1 998.42,1222.32 998.42,1171.42 X2.2@998,1171
  Bottom Layer w20: J6.2@319.97,675.03 J6.2@325.26,669.74 ; J6.2 J6.2@325.26,669.74 ; J6.2@337.51,682 J6.2@325.26,669.74 ; U7.5@905,710.18 907.22,712.4 U7.5 919,711.41 v1(919,688)
  other v1: 693,32 787,37 885,37 1393,38 269,45 402,49 501,50 573,50 1004,68 1174,75 1075,86 1305,102 379,133 426,133 498,133 580,133 298,171 1357,224 1515,229 170,248 291,253 685,256 717,256 746,256 1379,270 527,285 685,289 717,289 746,289 1380,308 1434,311 1529,311 685,321 747,321 717,322 167,328 439,343 685,352 716,354 747,354 1215,358 1250,358 165,364 1435,373 1338,389 1529,400 1434,429 1213,449 663,463 1417,498 1528,500 279,515 1118,583 254,601 1344,616 715,622 497,688 1465,713 1535,716 580,766 1462,809 1537,809 873,833 1499,865 1355,866 582,868 920,893 873,895 147,921 1006,930 1528,958 957,997 203,1009 713,1014 926,1017 1520,1027 671,1056 200,1062 827,1068 775,1069 801,1069 125,1072 1052,1073 827,1095 775,1096 801,1096 624,1101 1522,1107 775,1124 801,1124 827,1124 1425,1130 559,1145 106,1159 209,1178 413,1183 575,1185 1069,1185 882,1192 1505,1194 106,1212 626,1221 1069,1225 583,1231 913,1247 237,1262 194,1263 554,1263 106,1266 1069,1273 964,1278 1544,1294 711,1300 770,1301 827,1302 583,1306 1069,1318 440,1320 1475,1325 999,1331 571,1351 710,1364 623,1365 769,1365 824,1367 42,1373 442,1374 1071,1375 1534,1376 1308,1389 1372,1389 536,1392 967,1392 207,1399 587,1423 710,1424 771,1424 835,1424 898,1424 940,1447 1019,1449 564,1456 1075,1487 471,1493 377,1495 564,1497 940,1497 1218,1514 1136,1520 1035,1529 188,1532 1394,1536 564,1537 939,1539
I2C_SCL: R10.1 U5.42 U9.23 | length 464
  Top Layer w6: U9.23 473.23,1206.72 533.72,1206.72 v1(534,1207) 534,1316.02 512,1338.02 R10.1 ; v1(533,994) v1(533,994) 533.04,946.85 U5.42
  Bottom Layer w6: v1@533,993 533.5,993.5 533.5,1206.5 v1(534,1207)
I2C_SDA: R11.1 U5.43 U9.24 | length 385.8
  Top Layer w6: U9.24 474.28,1223.53 v1@511.53,1223.53 ; R11.1 514,1290 v1(514,1226) v1@515,1225 ; U5.43 513.69,947.12 513.69,1012.69 v1(514,1013)
  Bottom Layer w6: v1@514,1014 v1(514,1226)
LED_LB: R15.1 U5.16 | length 615.5
  Top Layer w6: v1(340,68) R15.1 ; v1(341,130) 341,142.67 474,275.67 v1(474,277) ; v1@473,276 v1@473,277 ; v1(474.02,577.25) 474.02,619.8 476.1,621.89 U5.16
  Bottom Layer w6: v1(340,68) 341,69 v1(341,130) ; v1(474,277) 474.31,277.31 474.31,576.96 v1(474.02,577.25)
LED_LF: R13.1 U5.14 | length 1420.4
  Top Layer w6: v1(75,966) 75,1279 112,1316 291,1316 v1(292,1317) ; v1(128,757) 128.19,757 220.43,664.76 232.33,664.76 304,593.09 v1(304,541) ; v1(292,1415) 292,1455 289,1458 R13.1@295,1464 ; v1(434.66,577.21) 434.35,577.52 434.35,623.68 U5.14
  Bottom Layer w6: v1(75,966) 75,810 v1(128,757) ; v1(292,1317) v1(292,1415) ; v1(304,541) 319.77,556.77 414.22,556.77 v1(434.66,577.21) v1@434.66,572.89
LED_RB: R16.1 U5.29 | length 1196.6
  Top Layer w6: U5.29 685.76,754.75 733.38,754.75 739.95,748.18 800.82,748.18 v1(896,653) ; v1(911,565) 925,551 1167.87,551 1286,432.87 v1(1286,411)
  Bottom Layer w6: v1(896,653) 896,650.77 911,635.77 v1(911,565) ; v1@1242,68 v1(1243,69) 1243,136.89 1329,222.89 1329,334 1286,377 v1(1286,411)
LED_RF: R14.1 U5.15 | length 1488.1
  Top Layer w6: U5.15 454.33,730.33 558,834 v1(558,835) ; v1(742,835) 844,835 v1(845,836) ; v1(1097,1414) 1099,1414 1149,1464 R14.1
  Bottom Layer w6: v1(558,835) v1(742,835) ; v1(845,836) 845,932.44 889.56,977 986.13,977 1097,1087.87 v1(1097,1414)
MPU_INT: U5.41 U9.12 | length 439.2
  Top Layer w6: v1(330.81,1140.77) 332.17,1142.13 349.97,1142.13 U9.12 ; v1(331,1090) v1(554,1090) ; U5.41 552.88,946.93 552.88,1011.88 v1(553,1012)
  Bottom Layer w6: v1(330.81,1140.77) 330.91,1140.68 330.91,1090.09 v1(331,1090) ; v1(553,1012) 554,1013 v1(554,1090)
NetANT1_2: ANT1.2 R26.1 | length 81.3
  Top Layer w20: ANT1.2@802,1522 802.79,1521.21 R26.1
NetC4_1: C4.1 L1.1 R2.2 SW1.2 U1.4 U1.5 | length 734.4
  Top Layer w6: R2.2 1302,809 1303,808
  Top Layer w20: SW1.2@1388.19,756.46 1389.65,755 SW1.2@1397,755
  Top Layer w39.37: L1.1 1268.75,920.1 1362.1,920.1 C4.1@1394,952 ; C4.1 1398,1018 1399,1019 1415,1019 U1.5@1416,1018
  Top Layer w59.06: L1.1 1300.24,904.36 1306.15,898.45 1306.15,811.85 1364,754 SW1.2@1412,754
NetC7_1: C7.1 U4.10 | length 147.3
  Top Layer w6: C7.1@85,686 89.8,690.8 89.8,704.46 109,723.67 109,764.87 120.13,776 144.87,776 149,771.87 U4.10@149,784
NetC15_2: C15.2 D2.1 J4.1 Q1.3 | length 179.8
  Bottom Layer w40: Q1.3 325.62,1263.62 D2.1@326,1264 ; D2.1 350,1287.26 350,1387 J4.1
NetC16_2: C16.2 D3.1 J5.2 Q2.3 | length 224
  Bottom Layer w40: J5.2 1225,1386.42 1225,1309.31 1268.31,1266 D3.1@1270,1266 ; D3.1 1298,1236.31 Q2.3@1298,1193
NetC20_2: C20.2 D4.1 J7.2 Q3.3 | length 214.1
  Bottom Layer w40: Q3.3@250.5,328 Q3.3 307,328 349.42,285.58 J7.2
NetC21_2: C21.2 D5.1 J8.1 Q4.3 | length 174.1
  Bottom Layer w40: J8.1 1225.39,284.39 D5.1@1248,307 ; D5.1 1293.91,307.09 Q4.3@1294,307
NetC23_2: C23.2 U8.19 | length 64.6
  Top Layer w6: C23.2@664,1098 665.54,1098 684.65,1078.9 U8.19
NetC26_1: C26.1 L2.2 | length 38.1
  Top Layer w12: C26.1@710,1262 710.21,1262.21 L2.2
NetC26_2: C26.2 C27.2 L3.1 L5.2 | length 128.5
  Top Layer w20: C27.2@624,1265 624,1264.01 625.8,1262.21 C26.2 L5.2 L3.1 L3.1@666.98,1345.98
NetC28_1: C28.1 C29.1 L7.2 U8.11 | length 186.4
  Top Layer w6: U8.11@839,1178 839,1187.72 868.98,1217.7 L7.2 868.98,1303.98 C28.1@870,1305 ; C28.1 871.2,1304 C29.1@916,1304
NetC30_2: C30.2 R27.1 U8.9 X2.1 | length 264.5
  Top Layer w6: U8.9 975.87,1118.3 1005,1089.17 X2.1@1005,1082 ; C30.2 1000,1023.5 X2.1@1000,1082 ; X2.1@1010,1103 1011.21,1104.21 R27.1
NetC31_2: C31.2 R27.2 U8.10 X2.3 | length 280.6
  Top Layer w6: U8.10 916.58,1138 940,1161.42 X2.3@940,1169 ; X2.3 942.28,1163.7 974.91,1131.08 1050.49,1131.08 1055,1135.59 R27.2@1055,1136 ; X2.3@952,1157 956.61,1161.61 C31.2
NetC34_1: C34.1 U9.10 | length 47.1
  Top Layer w6: C34.1@305,1173 306.95,1174.95 U9.10
NetD1_1: D1.1 L1.2 U1.1 | length 335.7
  Top Layer w39.37: L1.2 1436.36,1073.65 1461.51,1098.8 U1.1@1461.51,1132 ; D1.1 1304,1078 L1.2@1307,1075
NetL2_1: L2.1 L4.2 U8.13 | length 90.2
  Top Layer w12: L2.1@788,1263 788.48,1262.52 788.48,1219.71 L4.2 ; L4.2@789,1219 789,1218.21 799.43,1207.78 U8.13
NetL4_1: L4.1 L7.1 U8.12 | length 88.4
  Top Layer w6: U8.12 819.13,1208.38 828,1217.24 L4.1@828,1219 ; L7.1@827,1261 827,1221.2 L4.1
  Top Layer w12: L4.1@828.76,1218 L4.1@829,1218 ; L4.1@828.98,1219.02 L4.1
NetLED1_1: LED1.1 LED2.1 R6.1 | length 113.6
  Top Layer w10: LED2.1@905,389 905.53,389.53 LED1.1 ; 935,391 936,392 R6.1
NetLED1_2: LED1.2 U3.6 | length 174.1
  Top Layer w10: U3.6@833,277 835,279 949,279 963,293 LED1.2
NetLED2_2: LED2.2 U3.7 | length 67.6
  Top Layer w10: U3.7@837,332 902.47,332 LED2.2
NetLED3_2: LED3.2 R13.2 | length 55.5
  Top Layer w6: LED3.2@237,1507 239.75,1504.25 R13.2
NetLED4_2: LED4.2 R14.2 | length 51.8
  Top Layer w6: R14.2@1283.46,1504.25 1334.25,1504.25 LED4.2@1335,1505
NetLED5_2: LED5.2 R15.2 | length 60
  Top Layer w6: LED5.2 292.1,68.9 R15.2@295,66
NetLED6_2: LED6.2 R16.2 | length 55.8
  Top Layer w6: R16.2 1336,69 LED6.2@1338,67
NetQ1_1: Q1.1 R17.1 R19.1 | length 80.4
  Bottom Layer w6: R19.1 R17.1 190,1232 Q1.1@191,1231
NetQ2_1: Q2.1 R18.1 R20.1 | length 88.4
  Bottom Layer w6: Q2.1@1383,1228 1384,1227 R18.1 R20.1
NetQ3_1: Q3.1 R21.1 R23.1 | length 95
  Bottom Layer w6: R23.1 R21.1@117,310 ; R21.1 127.81,301.19 128.81,301.19 138,292 Q3.1@165.5,292
NetQ4_1: Q4.1 R22.1 R24.1 | length 92.3
  Bottom Layer w6: R22.1 R24.1 1378,343 Q4.1@1379,342 ; Q4.1@1393,341 Q4.1@1396.47,337.53
NetR1_1: R1.1 R3.2 U1.3 | length 179.7
  Top Layer w6: R3.2 R3.2@1469,1253
  Top Layer w10: U1.3@1389,1133 1387.6,1134.4 1387.6,1212.62 1428,1253.02 R1.1
  Top Layer w20: R1.1 R3.2
NetR5_1: R5.1 U3.4 | length 115.9
  Top Layer w39.37: R5.1 520.9,200.86 526.46,206.42 526.46,206.94 549.53,230 U3.4@596.56,230
NetR7_2: R7.2 U3.2 | length 257.5
  Top Layer w6: R7.2 415,253 491,329 U3.2@600,329
NetR25_2: R25.2 U8.16 | length 86.5
  Top Layer w6: R25.2 707.64,1188.36 720,1176 U8.16@720,1139
NRF_CE: U5.22 U8.1 | length 640.9
  Top Layer w6: U5.22@593.39,615.87 592.13,614.61 592.13,580.99 615.48,557.64 690.88,557.64 736.65,603.41 736.65,639.49 v1@736.77,639.61
  Bottom Layer w6: v1(736.65,640) 736.65,729.78 764,757.13 764,885.07 750.48,898.59 750.48,1018.48 v1(751,1019)
NRF_IRQ: U5.21 U8.6 | length 753.2
  Top Layer w6: U5.21@573.03,606.57 573.11,606.5 573.11,583.03 610.51,545.64 698.35,545.64 801.85,649.14 v1(801.85,650.12) ; v1(878,1040) 878,1056.73 879,1057.73 877.91,1058.82 878.13,1059.04 U8.6
  Bottom Layer w6: v1(801.85,650.12) 824.3,672.57 824.3,928.71 878,982.41 v1(878,1040)
NRST: C14.2 R12.1 T2.1 U5.7 | length 354.6
  Top Layer w6: C14.2@81,851 C14.2 79,895.5 R12.1@81.42,897.91 ; C14.2@82,845 C14.2@86,845 ; 92,853 133,853 147,839 261.53,839 324.98,775.55 U5.7
SPI_MISO: U5.27 U8.5 | length 510.9
  Top Layer w6: U5.27 685.02,716.12 759.91,716.12 799.88,676.14 v1(800.96,676.14) ; U8.5 838.83,1009.65 857.42,991.06 v1(857.42,988.7)
  Bottom Layer w6: v1@800.24,675.2 800.24,679.21 812.3,691.27 812.3,942.12 857.42,987.25 v1(857.42,988.7) ; v1@857.56,987.38 v1@857.56,989.13
SPI_MOSI: U5.28 U8.4 | length 446.9
  Top Layer w6: U5.28 767.68,736.18 v1(791.61,712.24) 791.97,711.89 v1@792.24,711.89 ; U8.4 821.63,1017.4 821.63,1000.32 831.42,990.54 v1(831.42,988.11)
  Bottom Layer w6: v1(791.61,712.24) 791.61,714.33 800.3,723.02 800.3,956.99 v1(831.42,988.11)
SPI_NSS: U5.25 U8.2 | length 495
  Top Layer w6: U5.25 720.08,677.13 722.48,674.72 728.8,674.72 762.68,640.85 v1@762.68,639.76 ; v1(769.48,988.11) 769.48,989.56 777.48,997.56 777.48,1017.65 U8.2
  Bottom Layer w6: v1(762.67,640.33) 762.67,640.86 751.98,651.54 751.98,716.45 776,740.47 776,981.59 v1(769.48,988.11)
SPI_SCK: U5.26 U8.3 | length 465.1
  Top Layer w6: U5.26 739.32,696.81 769.8,666.33 v1(770.98,666.33) ; U8.3 800.34,1019 800.34,989.12 v1(799.92,988.7)
  Bottom Layer w6: v1(770.98,666.33) 770.98,714.77 770.98,718.48 788.3,735.8 788.3,977.08 v1(799.92,988.7)
SWD_CLK: J3.3 U5.37 | length 1334.1
  Top Layer w6: U5.37 631.5,918.38 634.18,915.69 926.31,915.69 v1(1005,837) ; J3.3 837.4,84.65 791,131.05 791,407 875,491 906,491 v1(929,514) v1@931,514
  Bottom Layer w6: v1(929,514) 930,514 1012,596 1012,745.87 1019,752.87 1019,823 v1(1005,837)
SWD_IO: J3.2 U5.34 | length 1209.8
  Top Layer w6: U5.34@722.59,853.18 685.76,853.18 U5.34 685.35,855 928.13,855 999.13,784 v1(1000,784) ; J3.2 737.4,102.4 772,137 772,412 837,477 874,514 v1(895,514)
  Bottom Layer w6: v1(895,514) 1000,619 v1(1000,784)
UART_RX: R8.1 T4.1 U4.8 U5.31 | length 1652.6
  Top Layer w6: R8.1@82.13,770.55 82.13,771.13 111,800 111.87,800 123,811.13 123,811.91 136.09,825 175.31,825 188,812.31 U4.8@188,777 ; U4.8@189,777 189,730.13 230.13,689 242.03,689 343,588.03 v1(343,531) 343,518 420,441 522.84,441 530.66,448.82 582.18,448.82 T4.1@583,448 ; v1@435.98,542.2 437.06,541.13 463.62,541.13 ; 463.63,541.11 598.06,541.11 605.54,533.64 712.28,533.64 v1(827.87,649.23) v1@828.86,649.21 ; U5.31 685.41,796 727.16,796 740.16,809 845.29,809 v1(845.76,809.47)
  Bottom Layer w6: v1(343,531) 344,530 425.47,530 v1(436.6,541.13) ; v1(827.87,649.23) 827.87,653.35 836.3,661.77 836.3,781.02 845.76,790.48 v1(845.76,809.47)
UART_TX: T3.1 U4.9 U5.30 | length 1374.3
  Top Layer w6: U4.9@170,791 169.3,790.3 U4.9 169.3,732.86 225.4,676.76 237.3,676.76 323,591.06 v1(323,506) 323,505 325,503 324,502 324,490.96 362.96,452 T3.1@364,452 ; v1@454.88,522.09 455.08,522.28 469.28,522.28 476.09,529.09 592.45,529.09 599.9,521.64 729.67,521.64 v1(829.88,621.85) ; U5.30 687.09,778 726.13,778 738.6,790.47 863.6,790.47 v1(869.52,796.39)
  Bottom Layer w6: v1(323,506) 439.18,506 v1(455.31,522.13) ; v1(829.88,621.85) 848.3,640.27 848.3,775.17 v1(869.52,796.39)
USB_DN: J2.A7 J2.B7 U4.2 | length 346.4
  Top Layer w6: U4.2 169.3,590.69 158,579.39 158,470 v1(213,415) J2.B7@250,415 ; v1(213,376) J2.A7@252.99,375.99
  Bottom Layer w6: v1(213,376) v1(213,415)
USB_DP: J2.A6 J2.B6 U4.1 | length 404.6
  Top Layer w6: U4.1 149.6,621.6 U4.1@150,622 ; U4.1@151,617 150,616 150,588.36 146,584.36 146,438.49 188.49,396 ; J2.B6@252,356 206,356 188.49,373.51 188.49,396 ; J2.A6@252.33,395.67 J2.A6@253,395 ; J2.A6@254,396 188.49,396
VBAT: C6.1 F1.2 J1.2 U3.5 | length 377.5
  Top Layer w39.37: U3.5 C6.1@1017,230 ; C6.1 1023,421
VBATT: C15.1 C16.1 C20.1 C21.1 D2.2 D3.2 D4.2 D5.2 F1.1 J4.2 J5.1 J6.7 J7.1 J8.2 SW1.1 | length 3042.3
  Top Layer w39.37: v1@37.93,602 38,602.07 v1(38,622) 37.93,622.07 37.93,1295.93 96,1354 394,1354 ; v1(399,1344) v1(399,1367)
  Bottom Layer w39.37: v1(38,622) 38,601.34 v1(37.93,601.28) 97.14,601.28 123.71,574.7 123.71,507.88 115.84,500 J6.7 ; J6.7@158,488 158,502 159.45,500.55 159.45,487.55 192,455 257,455 402,310 J7.1@402,191.37 ; J4.2@398.62,1386.81 398.62,1289.38 D2.2@423,1265 ; J5.1@1174.63,1371.04 D3.2 1174.63,1231.96 1408,998.59 1408,637 v1@1406,635
  Bottom Layer w59.06: 1177,510 1321,510 1408,597 v1@1408,635
  other v1: 1106,480 1126,480 1146,480 1106,500 1126,500 1146,500 1106,520 1126,520 1146,520 1388,636 1408,636 1428,636
VUSB: C5.1 J2.A4B9 J2.B4A9 R5.2 R6.2 U3.8 | length 538.8
  Top Layer w10: U3.8 v1@829.5,419.5 ; v1(830,419) v1@829.5,419.5 ; R6.2@894,446 856,446 v1@829.5,419.5
  Top Layer w39.37: C5.1 483.34,391 ccw(c483.34,404.66) R5.2@493,395
  Bottom Layer w10: v1(535,402) 536.36,402 553.36,419 v1(830,419)
XTAL_IN: C12.2 U5.5 X1.1 | length 382.4
  Top Layer w6: X1.1@150,1004 150,1000.71 183.71,967 234,967 255,946 255,899.67 292,862.67 292,847.9 324.98,814.92 U5.5 ; X1.1@153,1010 153,1054.42 C12.2
XTAL_OUT: C13.2 U5.6 X1.3 | length 265.8
  Top Layer w6: C13.2 204,911 X1.3@208,915 ; X1.3 212.76,918.27 276,855.02 276,844.22 U5.6@324.98,795.24 ; X1.3@213,922.2 X1.3@213,923 ; U5.6@327,795 325.22,795 U5.6@324.98,795.24 ; U5.6 U5.6@324.98,795.24
pads on no net: HOLE1.1 HOLE2.1 HOLE3.1 HOLE4.1 J2.A5 J2.A8 J2.B5 J2.B8 J2.EP SW1.3 U1.6 U2.4 U4.4 U4.5 U4.6 U5.2 U5.3 U5.4 U5.32 U5.33 U5.38 U5.39 U5.40 U9.2 U9.3 U9.4 U9.5 U9.6 U9.7 U9.14 U9.15 U9.16 U9.17 U9.19 U9.21 U9.22

## Polygon pours and split planes (outlines as drawn)
no net on Top Overlay (solid, remove dead copper): 0,1574.8
GND on Multi-Layer (solid, remove dead copper): -87,1638
GND on Bottom Layer (solid, remove dead copper, pour order 30): 0,1574.8 1574.8,1574.8 1574.8,0 0,0
GND on Top Layer (solid, remove dead copper, pour order 32): 0,1574.8 1574.8,1574.8 1574.8,0 0,0

## Keep-outs
Keep-Out Layer:
  the board outline again, w5

## Other copper
Top Layer:
  rectangle net GND: 551.18,1496 667.43,1546
  pour cut-out: 1340.5,1038 1165.5,1038 1165.5,940 1340.5,940
  region net VUSB: 271,492 282.86,492 cw(c282.86,457.86) 307,482 313.1,475.9 cw(c289.2,452) 323,452 323,435.49 ccw(c343.48,435.49) 329,421 ccw(c348.31,440.31) 348.31,413 349,413 349,368 339.83,368 ccw(c339.83,361.17) 335,366 332.95,363.95 ccw(c344.9,352) 328,352 328,290.24 cw(c317.76,290.24) 325,283 cw(c315.34,292.65) 315.34,279 272,279 272,303 278.76,303 ccw(c278.76,313.24) 286,306 286.46,306.46 ccw(c277.93,315) 290,315 290,459.13 ccw(c283.18,459.17) 288,464 ccw(c278.35,454.36) 278.34,468 271,468
  region net VBAT: 991,492 991,405 1006,390 1149,390 1149,429 1104,429 1041,492
  region: 1041,483
  region: 1121.02,465.89
  region: 1113.07,468.13
  pour cut-out: 643.79,1291.21 690.05,1291.21 690.06,1440.03 643.8,1440.03
Bottom Layer:
  rectangle net VBATT: 1074.89,152 1193,551
  rectangle net VBATT: 382.76,152.2 1192.01,230.94
  region: 407.56,320.98
  region: 382.8,152.87
  region: 383,153
Multi-Layer:
  pour cut-out: 919.98,1574.02 580.66,1574.02 580.66,1440.21 919.98,1440.21

## Silkscreen, mask and mechanical layers (free items; w line width, h text height)
Top Overlay:
  region: 1402.36,652.82 1381.26,673.92 1394.96,673.92 1394.96,718.92 1409.88,718.92 1409.88,673.92 1423.46,673.92
  region: 984.87,680.06 914,844.43 848.06,680.06 914,746
  lines w5: 564,1280 564,1243 726,1243 726,1282 564,1281 ; 703,1434 703,1389 ; 704,1434 892,1434 892,1389 703,1389 ; 710,1389 714,1389 714,1282 ; 713,1389 703,1389
  text "Rev.F" at 1024,63 h60
Bottom Overlay:
  text "孔乙己 Fly-Balance" at 1145.53,396.13 h80
  text "3.3V" at 668.31,125 h60 r315
  text "DIO" at 761.81,125 h60 r315
  text "CLK" at 866.14,119.09 h60 r315
  text "GND" at 969.49,118.11 h60 r315
Mechanical 1:
  the board outline again, w5
Drill Drawing:
  text ".Legend" at 1769.69,-56.1 h60